# EAGLE board OUT_7SEG (EAGLE 9.6.2)
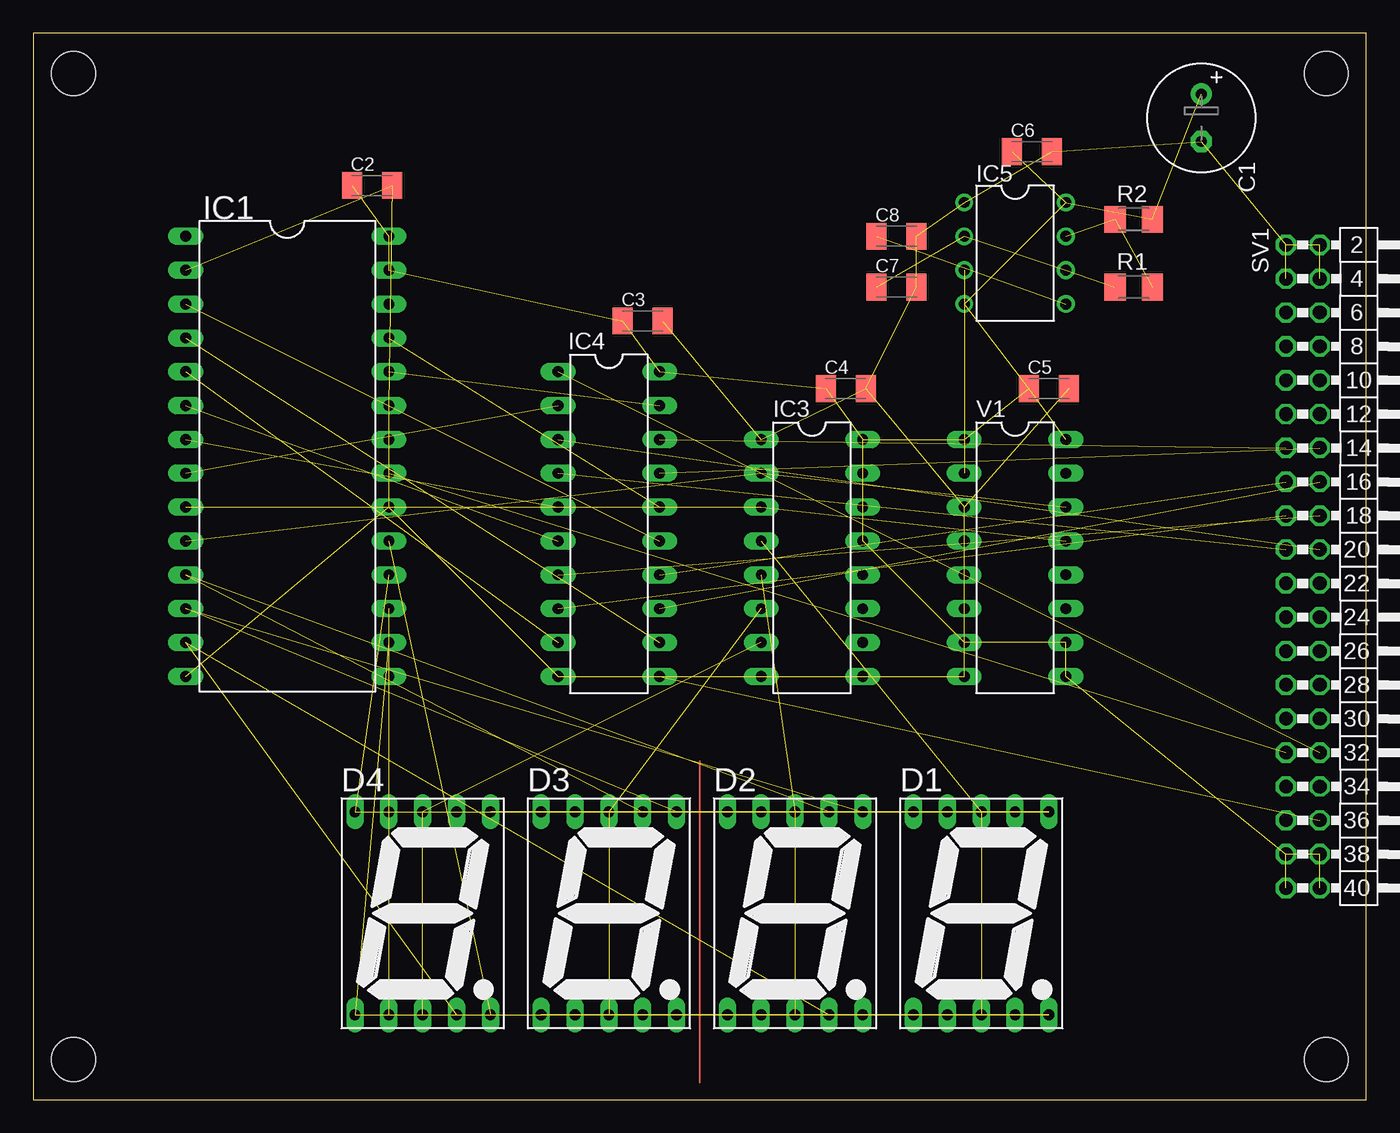
[diagram p0: board, top side]

Size 100 x 80 mm. Coordinates in mm from the lower left corner, seen from the top.
Outline: 0,0 100,0 100,80 0,80 0,0
Copper layers (1*16): Top 0.035mm / dielectric 1.5mm / Bottom 0.035mm
Design rules "default": minimum track width 6mil, minimum drill 0.35mm, track to track 6mil, track to pad 6mil, pad to pad 6mil, via to via 6mil, smd to smd 6mil, copper to edge 40mil, drill to drill 6mil, minimum pad ring 10mil, minimum via ring 8mil, stop-mask expansion 4mil, vias tented up to drill 0mil, thermal gap 10mil
Holes 3.3 mm at 3,77 3,3 97,3 97,77

## Footprints (pad centres in the part's own frame; a part is rotated, then mirrored left to right if it is on the bottom)
E3,5-8 = drill 0.813 pad 1.6: + -1.778,0 | drill 0.813 pad 1.6 octagon: - 1.778,0
C1206K = smd 1.5 x 2: 1 -1.5,0; 2 1.5,0
7SEG-13 = drill 0.813 long: 1 -5.08,-7.62; 2 -2.54,-7.62; 3 0,-7.62; 4 2.54,-7.62; 5 5.08,-7.62; 6 5.08,7.62; 7 2.54,7.62; 8 0,7.62; 9 -2.54,7.62; 10 -5.08,7.62
DIL28-6 = drill 0.813 long: 1 -16.51,-7.62; 2 -13.97,-7.62; 3 -11.43,-7.62; 4 -8.89,-7.62; 5 -6.35,-7.62; 6 -3.81,-7.62; 7 -1.27,-7.62; 8 1.27,-7.62; 9 3.81,-7.62; 10 6.35,-7.62; 11 8.89,-7.62; 12 11.43,-7.62; 13 13.97,-7.62; 14 16.51,-7.62; 15 16.51,7.62; 16 13.97,7.62; 17 11.43,7.62; 18 8.89,7.62; 19 6.35,7.62; 20 3.81,7.62; 21 1.27,7.62; 22 -1.27,7.62; 23 -3.81,7.62; 24 -6.35,7.62; 25 -8.89,7.62; 26 -11.43,7.62; 27 -13.97,7.62; 28 -16.51,7.62
DIL16 = drill 0.813 long: 1 -8.89,-3.81; 2 -6.35,-3.81; 3 -3.81,-3.81; 4 -1.27,-3.81; 5 1.27,-3.81; 6 3.81,-3.81; 7 6.35,-3.81; 8 8.89,-3.81; 9 8.89,3.81; 10 6.35,3.81; 11 3.81,3.81; 12 1.27,3.81; 13 -1.27,3.81; 14 -3.81,3.81; 15 -6.35,3.81; 16 -8.89,3.81
DIL20 = drill 0.813 long: 1 -11.43,-3.81; 2 -8.89,-3.81; 3 -6.35,-3.81; 4 -3.81,-3.81; 5 -1.27,-3.81; 6 1.27,-3.81; 7 3.81,-3.81; 8 6.35,-3.81; 9 8.89,-3.81; 10 11.43,-3.81; 11 11.43,3.81; 12 8.89,3.81; 13 6.35,3.81; 14 3.81,3.81; 15 1.27,3.81; 16 -1.27,3.81; 17 -3.81,3.81; 18 -6.35,3.81; 19 -8.89,3.81; 20 -11.43,3.81
DIL08 = drill 0.813 pad 1.27: 1 -3.81,-3.81; 2 -1.27,-3.81; 3 1.27,-3.81; 4 3.81,-3.81; 5 3.81,3.81; 6 1.27,3.81; 7 -1.27,3.81; 8 -3.81,3.81
M1206 = smd 1.6 x 2: 1 -1.4,0; 2 1.4,0
MA20-2W = drill 1.016 octagon: 1 -24.13,-1.27; 2 -24.13,1.27; 3 -21.59,-1.27; 4 -21.59,1.27; 5 -19.05,-1.27; 6 -19.05,1.27; 7 -16.51,-1.27; 8 -16.51,1.27; 9 -13.97,-1.27; 10 -13.97,1.27; 11 -11.43,-1.27; 12 -11.43,1.27; 13 -8.89,-1.27; 14 -8.89,1.27; 15 -6.35,-1.27; 16 -6.35,1.27; 17 -3.81,-1.27; 18 -3.81,1.27; 19 -1.27,-1.27; 20 -1.27,1.27; 21 1.27,-1.27; 22 1.27,1.27; 23 3.81,-1.27; 24 3.81,1.27; 25 6.35,-1.27; 26 6.35,1.27; 27 8.89,-1.27; 28 8.89,1.27; 29 11.43,-1.27; 30 11.43,1.27; 31 13.97,-1.27; 32 13.97,1.27; 33 16.51,-1.27; 34 16.51,1.27; 35 19.05,-1.27; 36 19.05,1.27; 37 21.59,-1.27; 38 21.59,1.27; 39 24.13,-1.27; 40 24.13,1.27

## Placement (x,y rotation side)
C1  [E3,5-8]  87.63,73.66 270 top
C2  [C1206K]  25.4,68.58 0 top
C3  [C1206K]  45.72,58.42 0 top
C4  [C1206K]  60.96,53.34 0 top
C5  [C1206K]  76.2,53.34 0 top
C6  [C1206K]  74.93,71.12 0 top
C7  [C1206K]  64.77,60.96 0 top
C8  [C1206K]  64.77,64.77 0 top
D1  [7SEG-13]  71.12,13.97 0 top
D2  [7SEG-13]  57.15,13.97 0 top
D3  [7SEG-13]  43.18,13.97 0 top
D4  [7SEG-13]  29.21,13.97 0 top
IC1  [DIL28-6]  19.05,48.26 270 top
IC3  74LS139N  [DIL16]  58.42,40.64 270 top
IC4  74LS377N  [DIL20]  43.18,43.18 270 top
IC5  NE555N  [DIL08]  73.66,63.5 270 top
R1  [M1206]  82.55,60.96 0 top
R2  [M1206]  82.55,66.04 0 top
SV1  [MA20-2W]  95.25,40 270 top
V1  74161N  [DIL16]  73.66,40.64 270 top

## Library data of the parts
C1-C8 = rcl; SPICEPREFIX: C
D1-D4 = special
IC1 = memory-idt; OC_FARNELL: unknown; OC_NEWARK: unknown
IC3 IC4 = 74xx-eu
IC5 = linear
R1 R2 = rcl; SPICEPREFIX: R
SV1 = con-lstb; OC_FARNELL: unknown; OC_NEWARK: unknown
V1 = 74ttl-din

## Nets
ADDR_0: IC1.8 IC4.2
ADDR_1: IC1.7 IC4.5
ADDR_2: IC1.6 IC4.6
ADDR_3: IC1.5 IC4.9
ADDR_4: IC1.4 IC4.12
ADDR_5: IC1.3 IC4.15
ADDR_6: IC1.25 IC4.16
ADDR_7: IC1.24 IC4.19
BUS0: IC4.3 SV1.20
BUS1: IC4.4 SV1.19
BUS2: IC4.7 SV1.18
BUS3: IC4.8 SV1.17
BUS4: IC4.13 SV1.16
BUS5: IC4.14 SV1.15
BUS6: IC4.17 SV1.14
BUS7: IC4.18 SV1.13
CLK: IC4.11 SV1.36
CLK2: IC5.3 V1.2
CNT0: IC1.10 IC3.2 V1.14
CNT1: IC1.9 IC3.3 V1.13
EN0: D1.3 D1.8 IC3.4
EN1: D2.3 D2.8 IC3.5
EN2: D3.3 D3.8 IC3.6
EN3: D4.3 D4.8 IC3.7
GND: C1.- C2.2 C3.2 C4.2 C5.2 C6.2 C7.2 C8.2 IC1.2 IC1.14 IC1.20 IC1.22 IC1.23 IC3.1 IC3.8 IC4.10 IC5.1 SV1.1 SV1.2 SV1.3 SV1.4 V1.3 V1.4 V1.5 V1.6 V1.8
ICLK: SV1.35
N$33: IC5.7 R1.2 R2.1
N$34: C8.1 IC5.5
N$36: C7.1 IC5.2 IC5.6 R1.1
NEG: IC1.21 SV1.31
OUT_0: D1.7 D2.7 D3.7 D4.7 IC1.11
OUT_1: D1.6 D2.6 D3.6 D4.6 IC1.12
OUT_2: D1.4 D2.4 D3.4 D4.4 IC1.13
OUT_3: D1.2 D2.2 D3.2 D4.2 IC1.15
OUT_4: D1.1 D2.1 D3.1 D4.1 IC1.16
OUT_5: D1.9 D2.9 D3.9 D4.9 IC1.17
OUT_6: D1.10 D2.10 D3.10 D4.10 IC1.18
OUT_7: D1.5 D2.5 D3.5 D4.5 IC1.19
VCC: C1.+ C2.1 C3.1 C4.1 C5.1 C6.1 IC1.27 IC1.28 IC3.13 IC3.14 IC3.15 IC3.16 IC4.20 IC5.4 IC5.8 R2.2 SV1.37 SV1.38 SV1.39 SV1.40 V1.1 V1.7 V1.9 V1.10 V1.16
WR_OUT: IC4.1 SV1.32

## Tracks (layer width: path | path; a pad name or v marks a point on that pad's centre or on a via)
ADDR_0  (1 unrouted)
ADDR_1  (1 unrouted)
ADDR_2  (1 unrouted)
ADDR_3  (1 unrouted)
ADDR_4  (1 unrouted)
ADDR_5  (1 unrouted)
ADDR_6  (1 unrouted)
ADDR_7  (1 unrouted)
BUS0  (1 unrouted)
BUS1  (1 unrouted)
BUS2  (1 unrouted)
BUS3  (1 unrouted)
BUS4  (1 unrouted)
BUS5  (1 unrouted)
BUS6  (1 unrouted)
BUS7  (1 unrouted)
CLK  (1 unrouted)
CLK2  (1 unrouted)
CNT0  (2 unrouted)
CNT1  (2 unrouted)
EN0  (2 unrouted)
EN1  (2 unrouted)
EN2  (2 unrouted)
EN3  (2 unrouted)
GND  (25 unrouted)
N$1
  Top 0.152: 50,1.27 50,25.4
N$33  (2 unrouted)
N$34  (1 unrouted)
N$36  (3 unrouted)
NEG  (1 unrouted)
OUT_0  (4 unrouted)
OUT_1  (4 unrouted)
OUT_2  (4 unrouted)
OUT_3  (4 unrouted)
OUT_4  (4 unrouted)
OUT_5  (4 unrouted)
OUT_6  (4 unrouted)
OUT_7  (4 unrouted)
VCC  (24 unrouted)
WR_OUT  (1 unrouted)